# Altium PCB PCBSetFilter291216V1.PcbDoc
Units mm, origin at the board's own origin, x right, y up, seen from the top; angles counter-clockwise.
Board outline 140 x 82.5 mm, 2 copper layers (Top Layer, Bottom Layer), stack 2.071 mm thick; 12 components, 11 nets, 47 pads, 0 vias.
Unrouted connection lines stored in the file: 20.
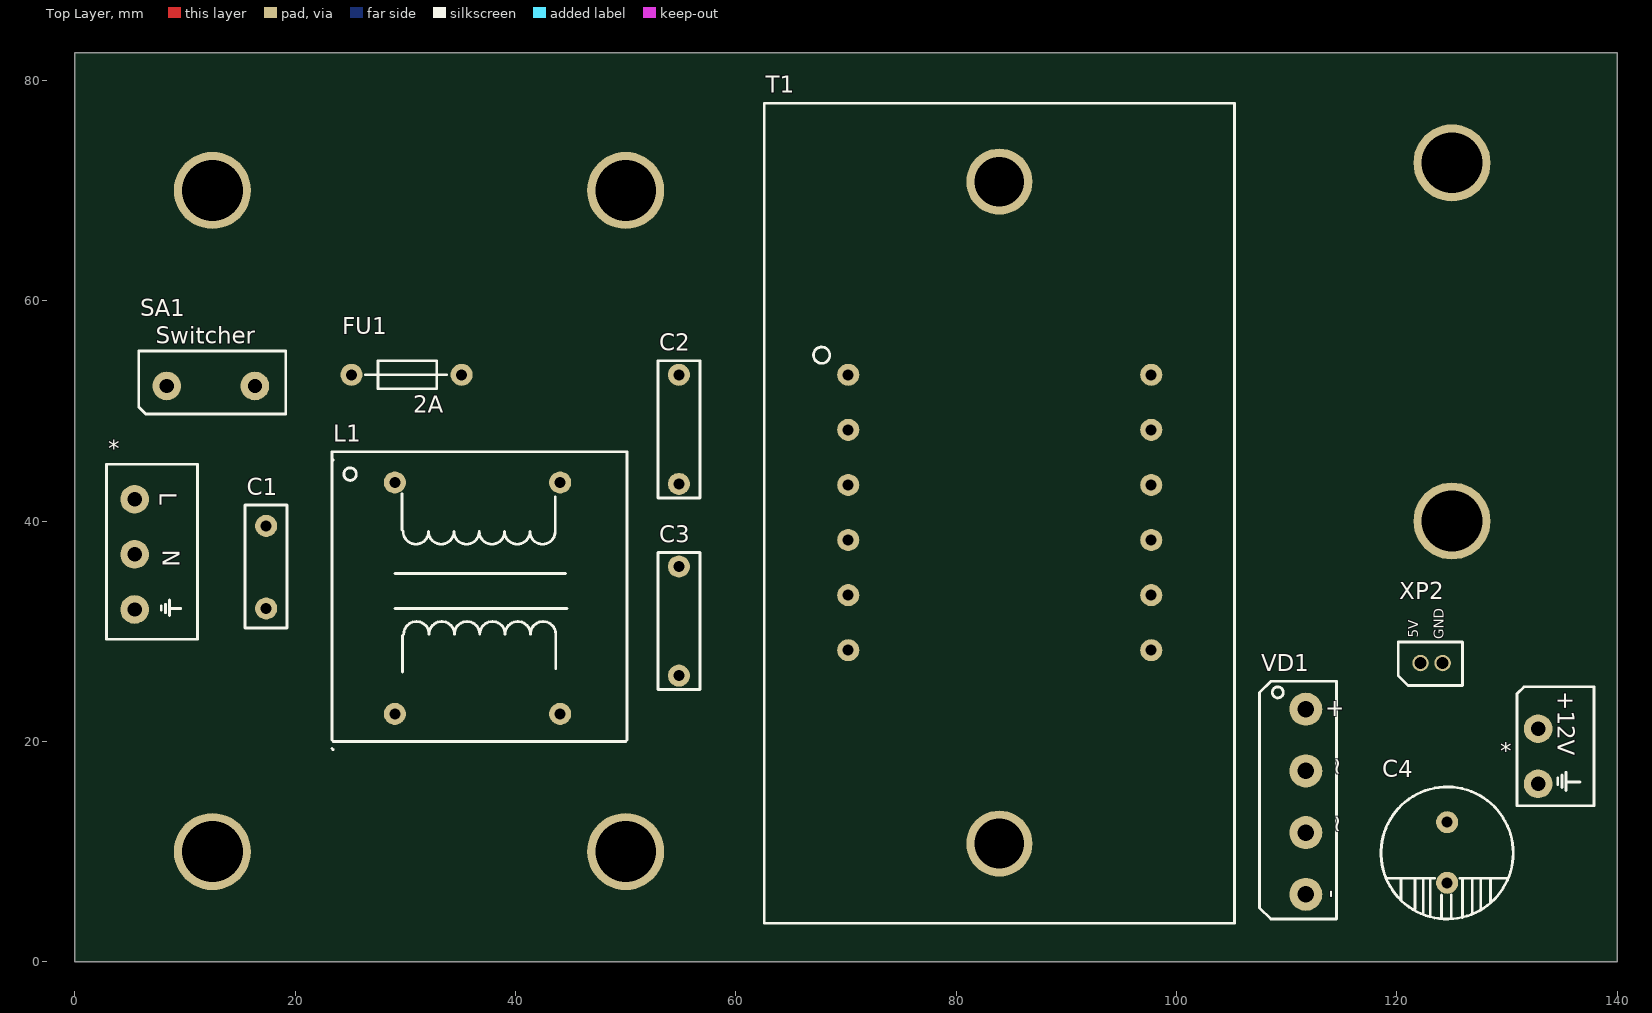
[diagram p0: Top Layer view]
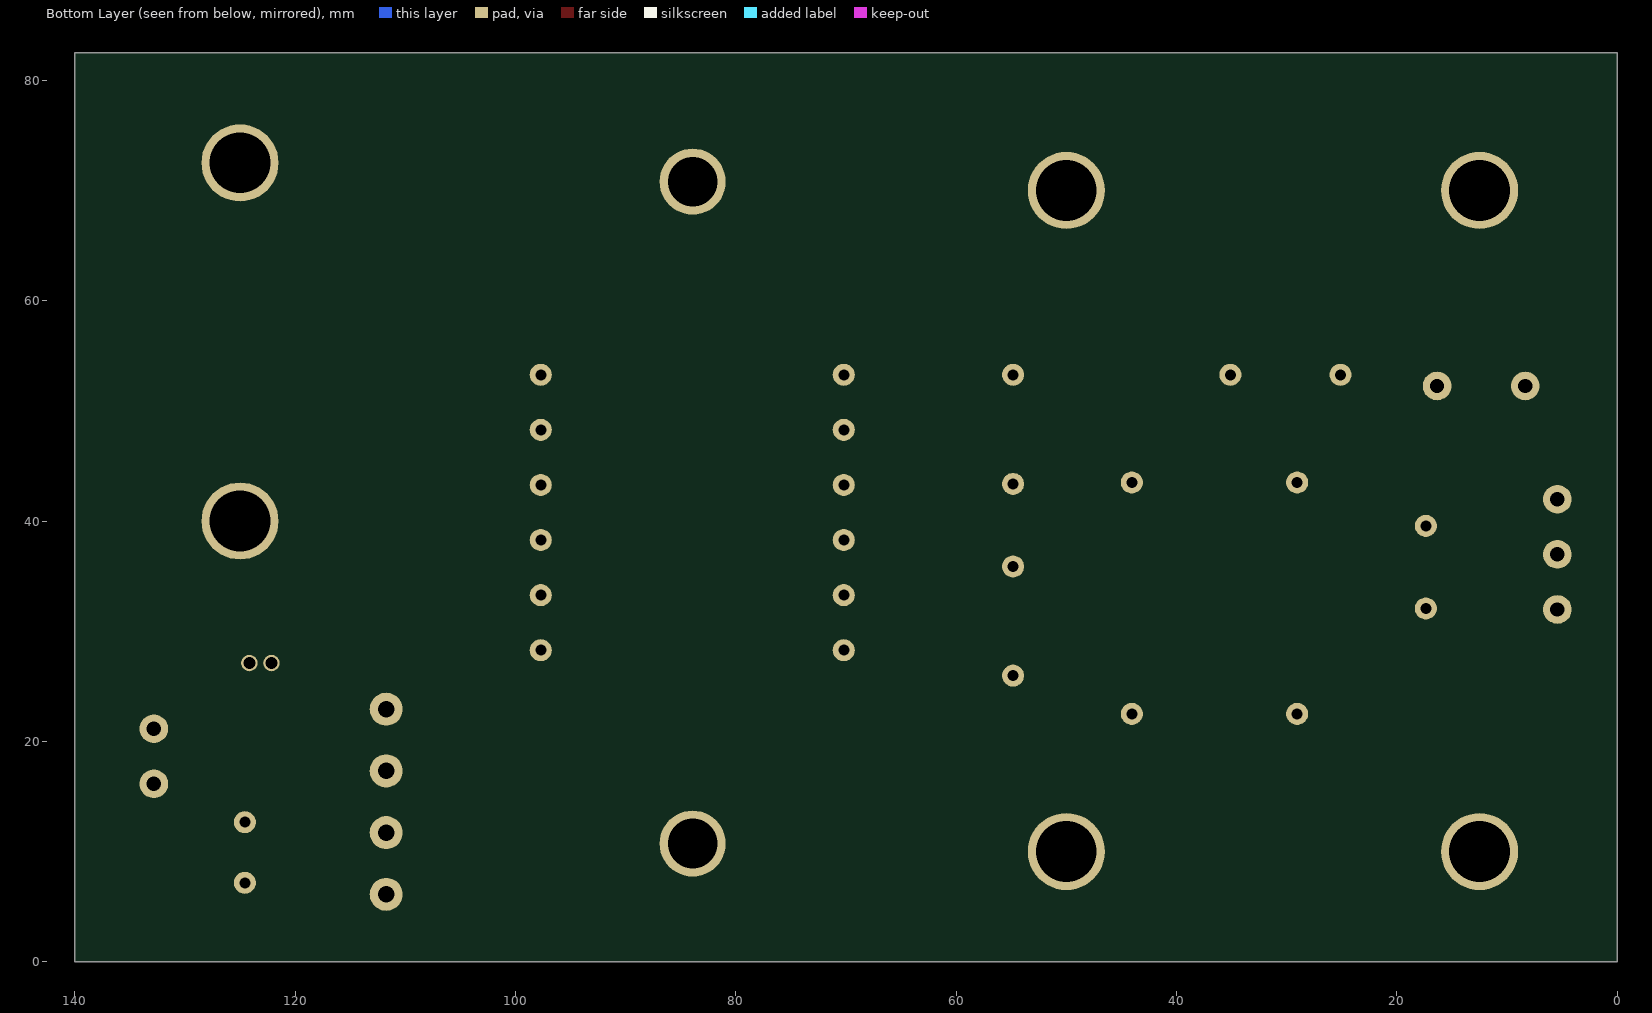
[diagram p1: Bottom Layer view, seen from below]

## Layer stack, top to bottom
Top Solder: solder mask 0.0102, Solder Resist, Dk 3.5
Top Layer: signal copper 0.0356
Dielectric 1: dielectric 2, FR-4, Dk 4.8
Bottom Layer: signal copper 0.0356
Bottom Solder: solder mask 0.0102, Solder Resist, Dk 3.5

## Board outline
0,0 140,0 140,82.5 0,82.5

## Design rules (kind name [scope] priority, off if disabled: settings)
Clearance [All] p1: gap=0.254
Height [All] p1: minheight=0 maxheight=100 prefheight=25.4
PolygonConnect [All] p1: connectstyle=Relief reliefconductorwidth=0.254 reliefentries=4 polygonreliefangle="90 Angle" airgapwidth=0.254
RoutingVias [All] p1: holewidth=0.711 width=1.27 viastyle="Through Hole" minholewidth=0.711 minwidth=1.27 maxholewidth=0.711 maxwidth=1.27
SolderMaskExpansion [All] p1: expansion=0.102
Width [All] p1: maxlimit=0.254 minlimit=0.254 preferedwidth=0.254
29 further rules are at their usual default settings.

## Classes and differential pairs
component class Circuit: * C1 C2 C3 C4 FU1 L1 SA1 T1 VD1 XP2

## Components (designator, comment, footprint, x,y, rotation, side; value= is the part's Value field where it differs from the comment)
* "Pinout 220V" Con_220 5.433,41.969 r270 top
* "Paika_12V" Con_12 132.814,21.141 r270 top
C1 "Capasitor" KXP2220 17.371,39.556 r270 top
C2 "Capasitor" JN1 54.836,53.272 r270 top
C3 "Capasitor" JN1 54.836,35.873 r270 top
C4 "Capasitor-electrical" RD1H108M12025BB 124.559,12.663 r270 top
FU1 "FU" FU2A 25.118,53.272 r0 top
L1 "Induction" ET24 29.055,43.493 r0 top
SA1 "переключатель" Switcher 8.354,52.256 r0 top
T1 "Transforms" TransformIE48 70.203,53.272 r0 top
VD1 "Most" RC-407 112.621,22.919 r270 top
XP2 "WB-2.0" Con_5V 122.146,27.11 r0 top

## Footprints (in the part's own frame and the unit in brackets; to place one, negate y for a bottom-side part, rotate by r counter-clockwise, add the part's x,y. Pads: shape width x height; smd on the part's side, far side on the other; paste and mask are expansions set on the pad)
Con_5V [mm]
  round 1.5 hole 1.1: 1(0,0) 2(2,0)
  silkscreen extent -2.03,-2.03 3.81,1.91, body extent -2.11,-2.03 3.89,1.97, height 9.39
Con_12 [mm]
  round 2.6 hole 1.3: 1(0,0) 2(5,0)
  silkscreen extent -3.81,-1.91 6.98,5.08
Con_220 [mm]
  round 2.6 hole 1.3: 1(0,0) 2(5,0) 3(10,0)
  silkscreen extent -3.18,-2.54 12.7,5.72
ET24 [mm]
  round 2 hole 1: 1(0,0) 2(15,0) 3(15,-21) 4(0,-21)
  silkscreen extent -5.71,-24.26 21.08,2.79, body extent -5.5,-23.5 20.5,2.5, height 22
FU2A [mm]
  round 2 hole 1: 1(0,0) 2(10,0)
  silkscreen extent 1.27,-1.27 8.64,1.27, body extent -0.45,-2.9 10.45,2.9, height 5.9
JN1 [mm]
  round 2 hole 1: 1(0,0) 2(9.906,0)
  silkscreen extent -1.27,-1.91 11.18,1.91, body extent -0.45,-1.5 10.33,1.5, height 10.5
KXP2220 [mm]
  round 2 hole 1: 1(0,0) 2(7.5,0)
  silkscreen extent -1.91,-1.91 9.27,1.91, body extent -1.75,-1.5 9.25,1.5, height 8.5
RC-407 [mm]
  round 3 hole 1.5: 1(0,-0.889) 2(5.6,-0.889) 3(11.2,-0.889) 4(16.8,-0.889)
  silkscreen extent -2.54,-5.08 19.05,1.91, body extent -1.35,-5.09 18.15,1.41, height 17.15
RD1H108M12025BB [mm]
  round 2 hole 1: 1(0,0) 2(5.5,0)
  silkscreen extent -3.21,-6 8.79,6, body extent -2.25,-5 7.75,5, height 18
Switcher [mm]
  round 2.6 hole 1.3: 1(0,0) 2(8,0)
  silkscreen extent -2.54,-2.54 10.79,3.17
TransformIE48 [mm]
  round 6 hole 4.5: 0(13.716,-42.545) 0(13.716,17.526)
  round 2 hole 1: 1(0,0) 2(0,-5) 3(0,-10) 4(0,-15) 5(0,-20) 6(0,-25) 7(27.5,0) 8(27.5,-5) 9(27.5,-10) 10(27.5,-15) 11(27.5,-20) 12(27.5,-25)
  silkscreen extent -7.62,-49.78 35.05,24.64, body extent -7.6,-49.83 35.1,24.83, height 42

## Part data
*: library part Connector_220V
*: library part Conector_12V

## Free pads (board coordinates)
  round 7 hole 5.5: 0(12.5,10) 1(50,10) 2(12.5,70) 3(50,70) 4(125,72.5) 5(125,40)

## Nets (pads, with @x,y where several pads share a name; then routed paths per layer and width w, separated by ;. In a path a pad name is that pad's centre, name@x,y a point inside that pad or via, vN(x,y) a via of type N, cw(c..) or ccw(c..) an arc to the next point about the centre after c; other vN are vias at no path point)
ETH: *.3 C2.2 C3.1
L: *.1@5.433,41.969 SA1.1
N: *.2@5.433,36.969 C1.2 L1.4
Net*_1: *.1@132.814,21.141 C4.1 VD1.1 XP2.1
Net*_2: *.2@132.814,16.141 C4.2 VD1.4 XP2.2
NetC1_1: C1.1 FU1.2 L1.1
NetC2_1: C2.1 L1.2 T1.1
NetC3_2: C3.2 L1.3 T1.6
NetFU1_1: FU1.1 SA1.2
NetT1_8: T1.8 VD1.2
NetT1_11: T1.11 VD1.3
pads on no net: T1.0 T1.2 T1.3 T1.4 T1.5 T1.7 T1.9 T1.10 T1.12

## Silkscreen, mask and mechanical layers (free items; w line width, h text height)
board:
  the board outline again, w0.254

## Text inside footprints (layer, text, board x,y; h text height)
*: Top Overlay "+12V" at 134.592,24.57 h1.52 r270
*: Top Overlay "L" at 7.719,42.604 h1.52 r270; Top Overlay "N" at 7.973,37.397 h1.52 r270
FU1: Top Overlay "2A" at 30.706,49.843 h1.52
SA1: Top Overlay "Switcher" at 7.338,56.066 h1.52
VD1: Top Overlay "~" at 115.288,11.616 h1.52 r90; Top Overlay "~" at 115.288,16.823 h1.52 r90; Top Overlay "-" at 114.653,5.774 h1.52 r90; Top Overlay "+" at 113.51,22.284 h1.52
XP2: Top Overlay "5V" at 122.273,29.396 h1.52 r90; Top Overlay "GND" at 124.559,29.269 h1.52 r90